# Altium PCB VoiceTouch_PCB_L6_PCB_L6.PcbDoc
Units mm, origin at the board's own origin, x right, y up, seen from the top; angles counter-clockwise.
Board outline 15.41 x 20.5 mm, 6 copper layers (L1, L2 (GND), L3, L4 (PWR), L5 (GND), L6), stack 0.726 mm thick; 33 components, 61 nets, 198 pads, 0 vias.
Unrouted connection lines stored in the file: 114.
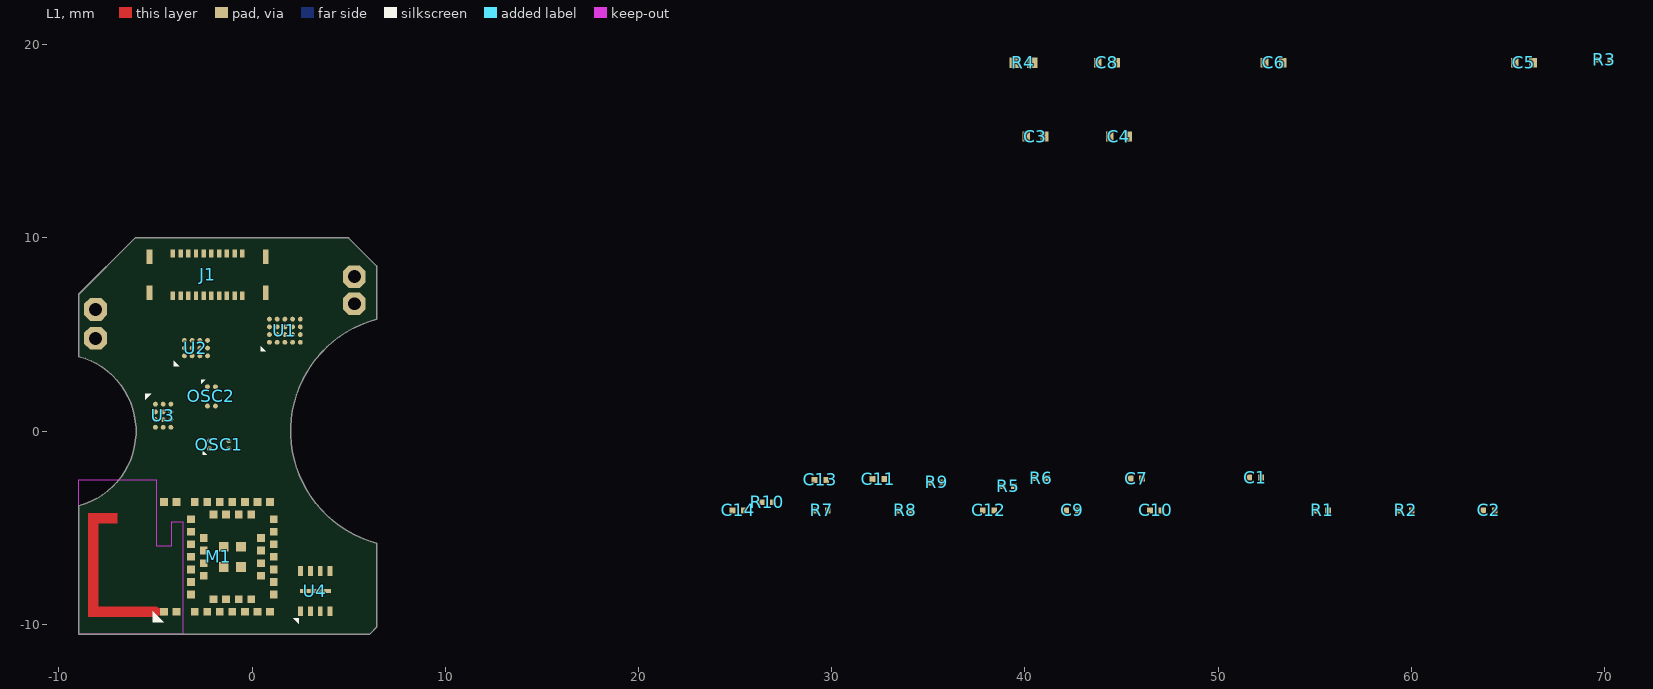
[diagram p0: L1 view]
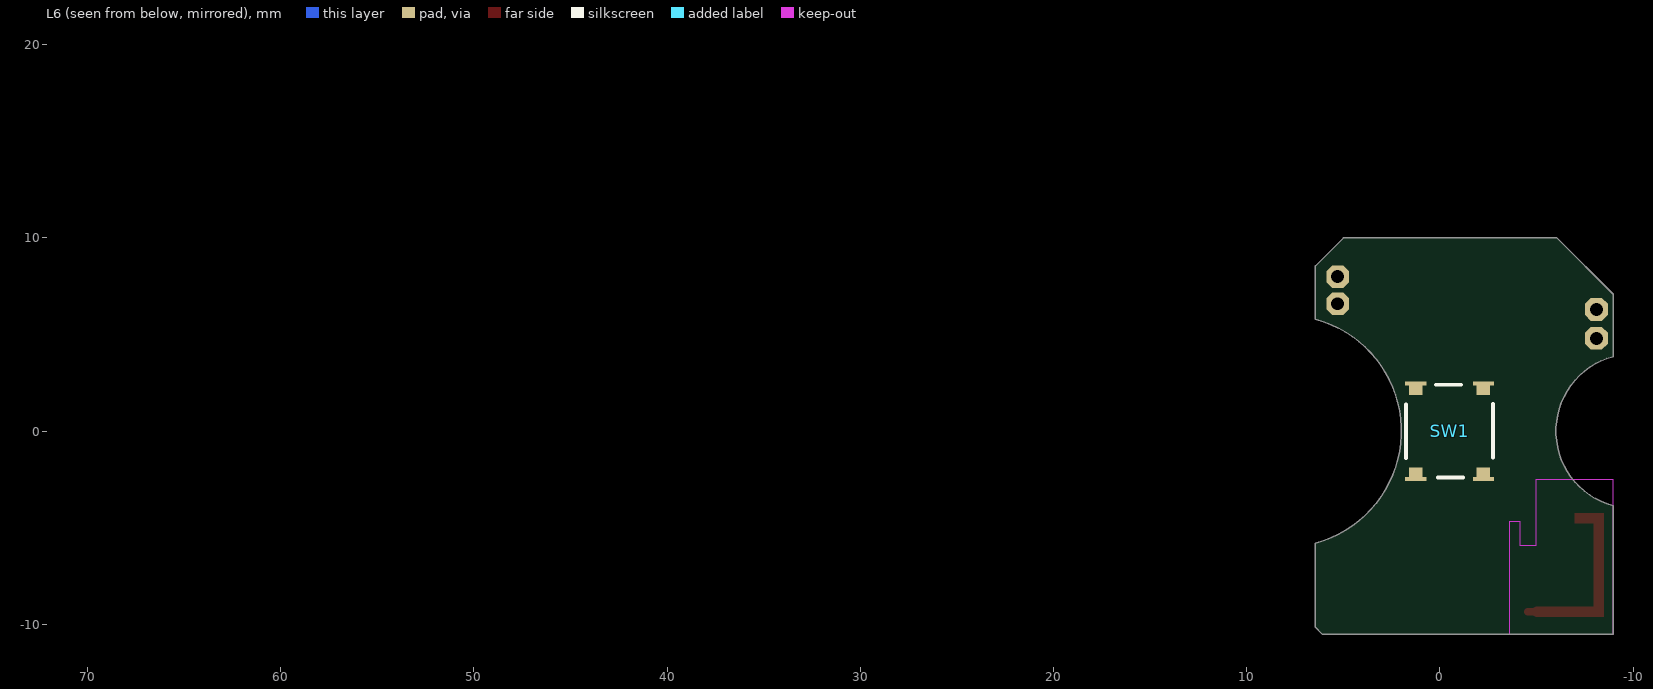
[diagram p1: L6 view, seen from below]
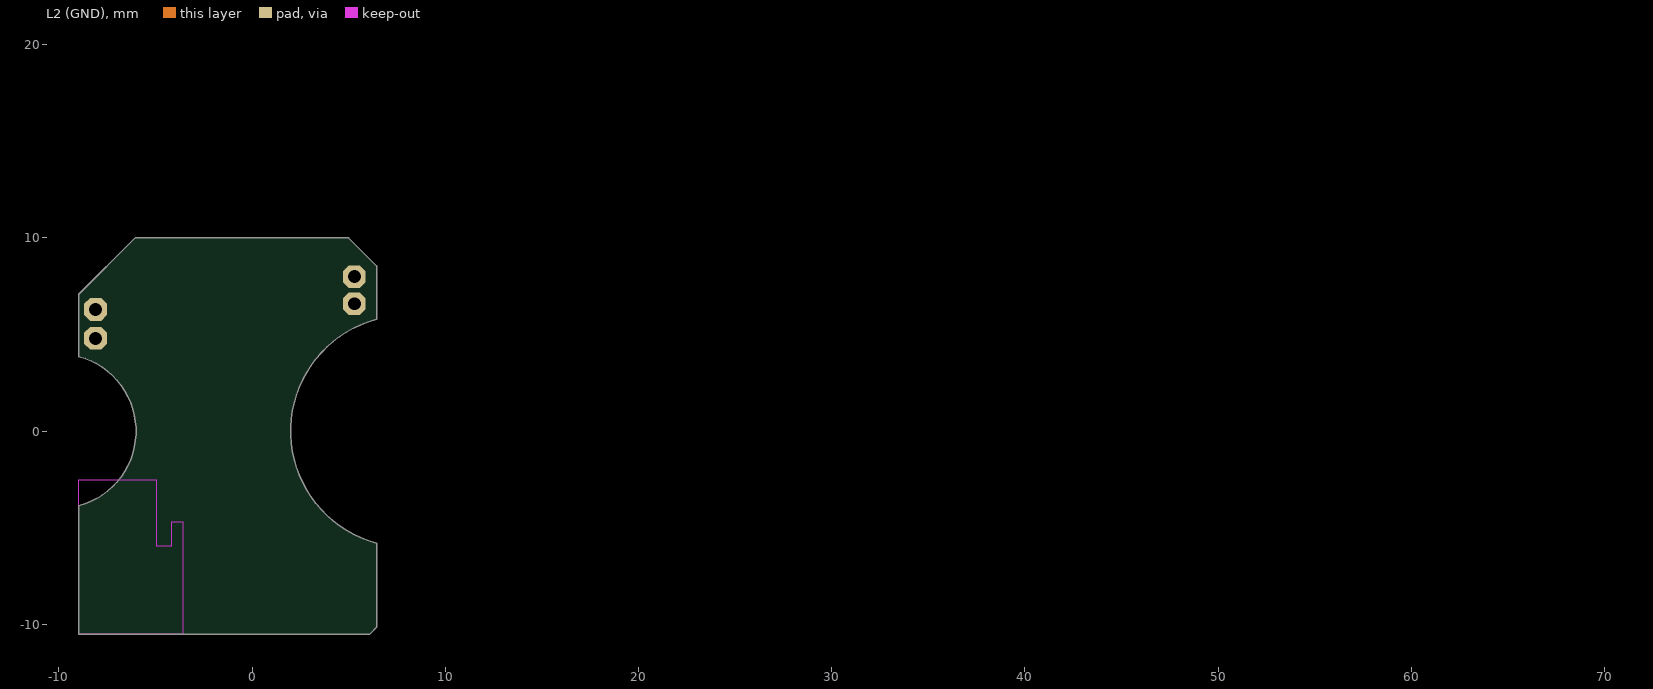
[diagram p2: L2 (GND)]
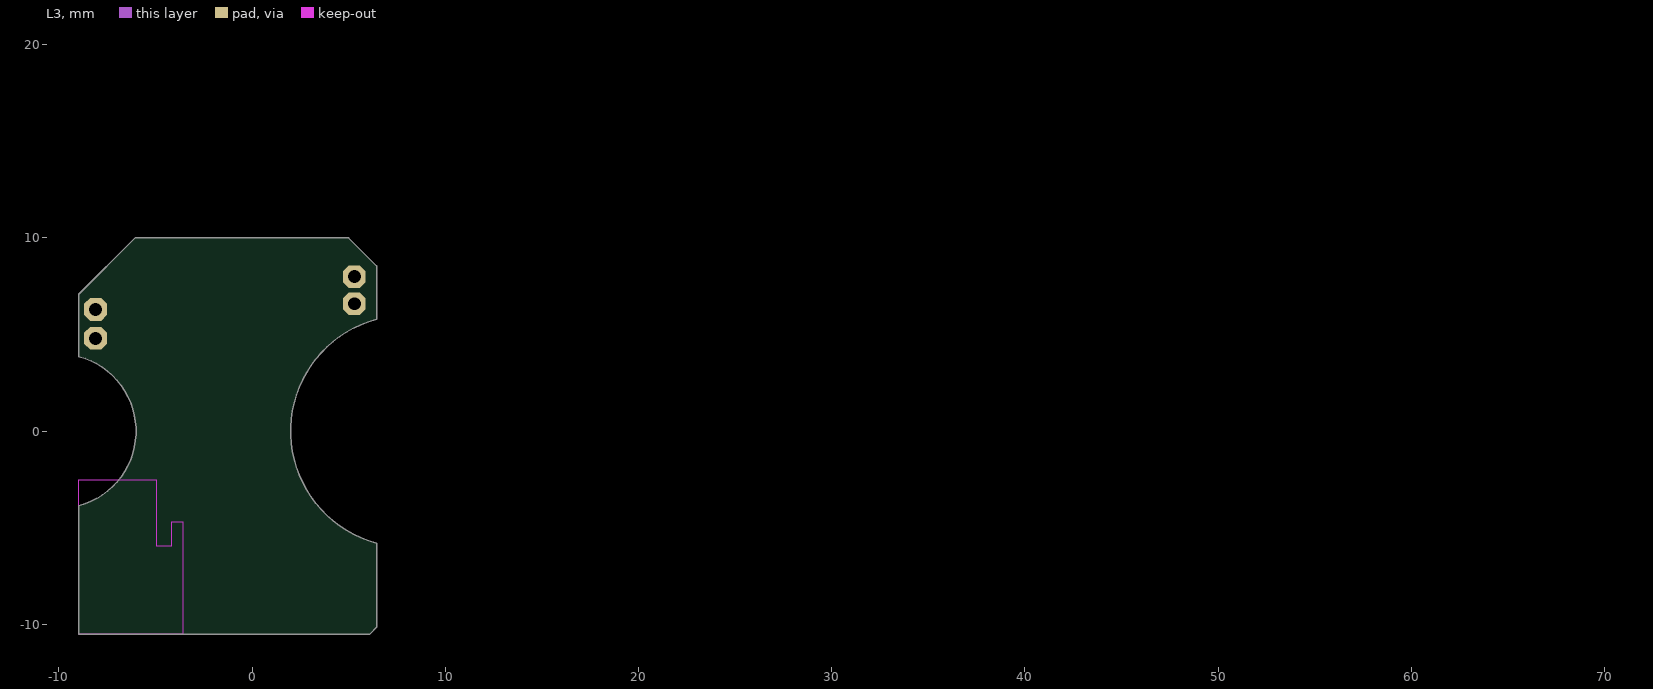
[diagram p3: L3]
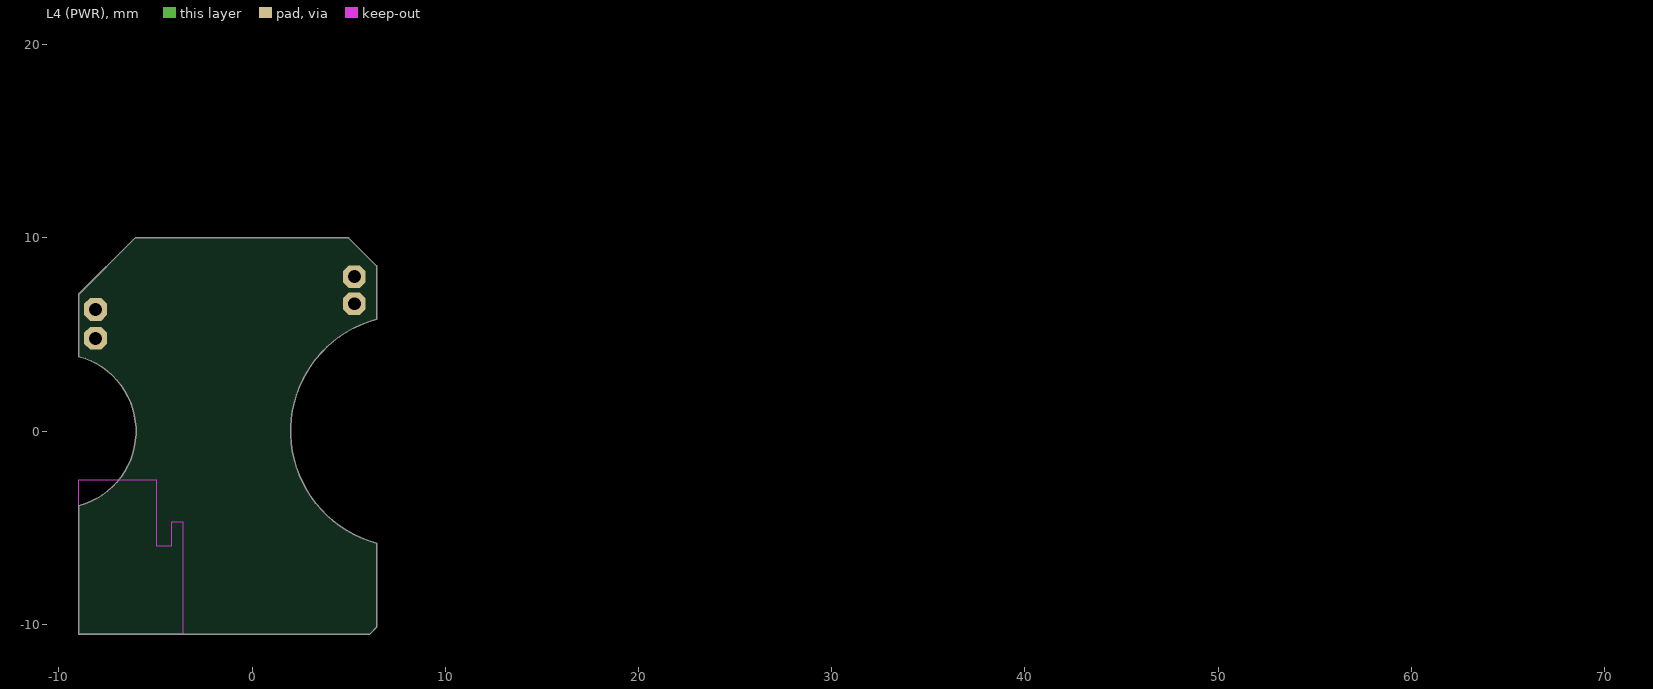
[diagram p4: L4 (PWR)]
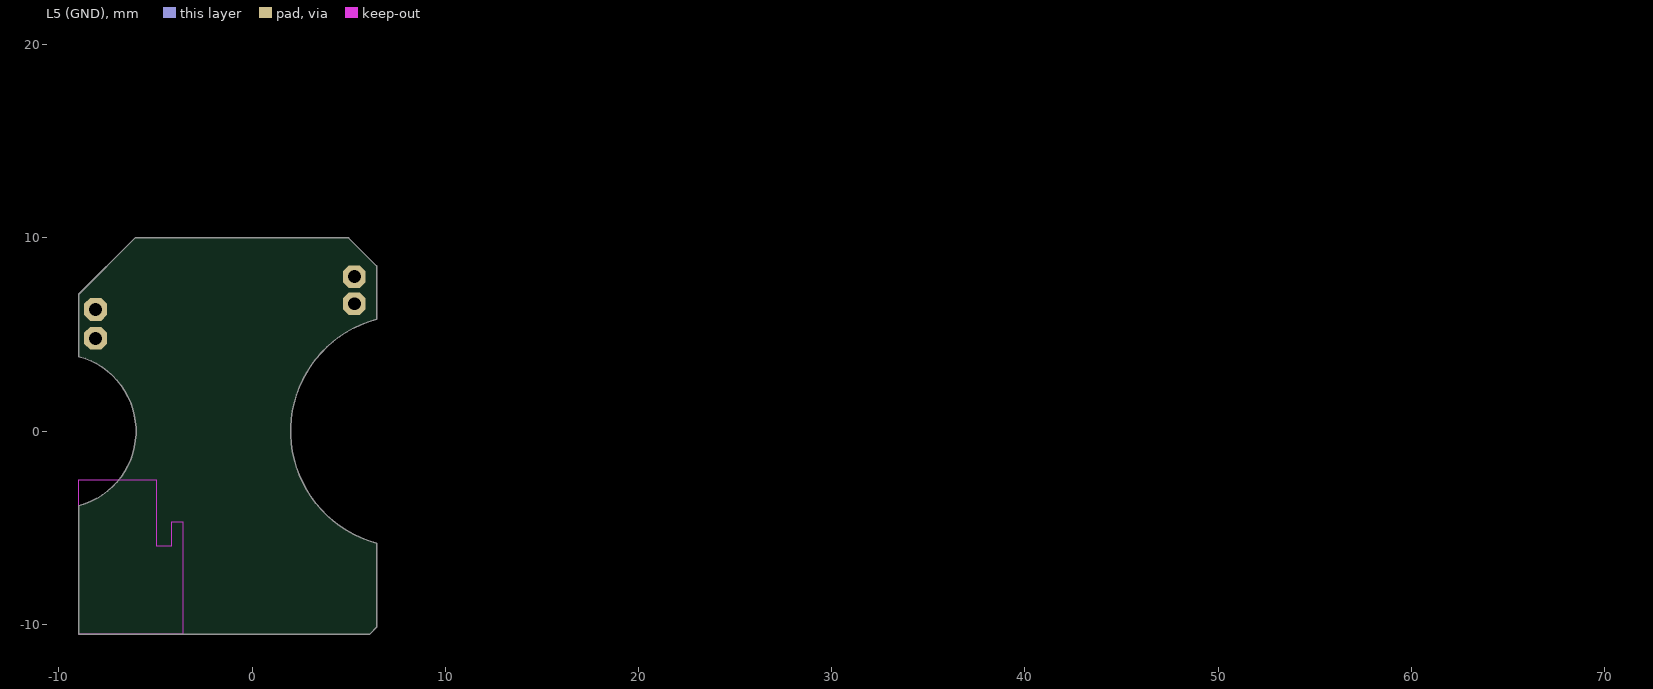
[diagram p5: L5 (GND)]

## Layer stack, top to bottom
Top Solder: solder mask 0.02, SM-001, Dk 4.2
L1: signal copper 0.012
Dielectric 1: prepreg 0.06, PP-01, Dk 4.5
L2 (GND): signal copper 0.018
Dielectric 2: core 0.2, Core-01, Dk 4.5
L3: signal copper 0.018
Dielectric 3: prepreg 0.11, PP-02, Dk 4.5
L4 (PWR): signal copper 0.018
Dielectric 4: core 0.2, Core-01, Dk 4.5
L5 (GND): signal copper 0.018
Dielectric 5: prepreg 0.06, PP-01, Dk 4.5
L6: signal copper 0.012
Bottom Solder: solder mask 0.02, SM-001, Dk 4.2

## Board outline
-8.965,-10.5 -8.965,-3.864 ccw(c-10,0) -8.965,3.864 -8.965,7.085 -6.05,10 5,10 6.447,8.553 6.447,5.796 ccw(c8,0) 6.447,-5.796 6.447,-10.153 6.1,-10.5

## Design rules (kind name [scope] priority, off if disabled: settings)
AcuteAngle [All] p1: minimum=4.49000000000000E+0001 checktracksonly=FALSE
BoardOutlineClearance BoardOutlineClearance_Silk [OnLayer('Top Overlay') or OnLayer('Bottom Overlay')] p1: gap=0 ignorepadtopadclearanceinfootprint=FALSE
BoardOutlineClearance BoardOutlineClearance_Text [IsText] p2: gap=0 ignorepadtopadclearanceinfootprint=FALSE
BoardOutlineClearance BoardOutlineClearance_EdgeComponents [InPadClass('Edge Pads')] p3: gap=0 ignorepadtopadclearanceinfootprint=FALSE
BoardOutlineClearance [All] p4: gap=0.3 ignorepadtopadclearanceinfootprint=FALSE except(0: THPad-CutoutEdge)
Clearance Clearance_Fiducials [InComponentClass('Fiducial') vs InComponentClass('Fiducial')] p1: gap=0 ignorepadtopadclearanceinfootprint=FALSE
Clearance "Clearance_Poly to Keepout" [IsRegion vs OnLayer('Keep-Out Layer')] p2: gap=0.1 ignorepadtopadclearanceinfootprint=FALSE
Clearance "Clearance_Poly to Inner Layers" [IsRegion and InLayerClass('Internal Layers')] p3: gap=0.15 ignorepadtopadclearanceinfootprint=FALSE
Clearance "Clearance_Poly to all" [IsRegion and InNet('GND')] p4: gap=0.15 ignorepadtopadclearanceinfootprint=FALSE
Clearance Clearance_NPTH [(InPadClass('NPTH'))] p5: gap=0.2 ignorepadtopadclearanceinfootprint=FALSE
Clearance [All] p6: gap=0.1 ignorepadtopadclearanceinfootprint=FALSE
ComponentClearance ComponentClearance_J2_J4 [InComponent('J2') vs InComponent('J4')] p1: gap=0 collisioncheckmode=3 verticalgap=0 showdistances=FALSE
ComponentClearance ComponentClearance_R5_R2 [InComponent('R5') vs InComponent('R2')] p2: gap=0 collisioncheckmode=3 verticalgap=0 showdistances=FALSE
ComponentClearance ComponentClearance_R8_R12 [InComponent('R8') vs InComponent('R12')] p3: gap=0 collisioncheckmode=3 verticalgap=0 showdistances=FALSE
ComponentClearance ComponentClearance_TESTPOINTS [InComponentClass('TESTPOINTS')] p4: gap=0 collisioncheckmode=3 verticalgap=0 showdistances=FALSE
ComponentClearance [All] p5: gap=0.1 collisioncheckmode=3 verticalgap=0.1 showdistances=FALSE
DiffPairsRouting [All] p1: maxlimit=0.165 minlimit=0.155 mostfreqgap=0.165 toplayer_mingap=0.165 toplayer_minwidth=0.105 toplayer_maxwidth=0.105 toplayer_prefwidth=0.105 midlayer1_maxgap=0.155 midlayer1_prefgap=0.155 midlayer1_minwidth=0.13 midlayer1_maxwidth=0.13 midlayer1_prefwidth=0.13 midlayer2_maxgap=0.155 midlayer2_prefgap=0.155 midlayer2_minwidth=0.13 midlayer2_maxwidth=0.13 midlayer2_prefwidth=0.13 midlayer3_mingap=0.165 midlayer3_minwidth=0.105 midlayer3_maxwidth=0.105 midlayer3_prefwidth=0.105 midlayer4_mingap=0.165 midlayer4_minwidth=0.105 midlayer4_maxwidth=0.105 midlayer4_prefwidth=0.105 bottomlayer_mingap=0.165 bottomlayer_minwidth=0.105 bottomlayer_maxwidth=0.105 bottomlayer_prefwidth=0.105 maxuncoupledlength=12.7
HoleSize [All] p1: absolutevalues=TRUE maxlimit=6.5 minlimit=0.1 maxpercent=80.000 minpercent=20.000
HoleToHoleClearance [All] p1: gap=0.2 allowstackedmicrovias=TRUE
Length [InNetClass('Xtal')] p1: maxlimit=2540 minlimit=0
MinimumAnnularRing MinimumAnnularRing_ThermalPadVias [IsVia and InAnyComponent] p1: minimumring=0.1
MinimumAnnularRing MinimumAnnularRing_MicroVia [IsVia AND (HoleSize = 0.1)] p2: minimumring=0.05
MinimumAnnularRing [All] p3: minimumring=0.1
MinimumSolderMaskSliver [All] p1: minsoldermaskwidth=0.03
PlaneClearance [All] p1: clearance=0.2
PlaneConnect [All] p1: planeconnectstyle=Direct reliefexpansion=0.1 reliefentries=4 reliefconductorwidth=0.1 reliefairgap=0.1
PolygonConnect [All] p1: connectstyle=Direct reliefconductorwidth=0.1 reliefentries=4 polygonreliefangle="90 Angle" airgapwidth=0.1
RoutingVias ThermalPadVias [IsVia and InAnyComponent] p1: holewidth=0.2 width=0.45 viastyle="Through Hole" minholewidth=0.2 minwidth=0.4 maxholewidth=0.25 maxwidth=0.5
RoutingVias [All] p2: holewidth=0.2 width=0.4 viastyle="Through Hole" minholewidth=0.1 minwidth=0.2 maxholewidth=0.3 maxwidth=0.55
SMDEntry [All] p1: side=TRUE corner=TRUE anyangle=TRUE
SilkToSilkClearance [All] p1: silktosilkclearance=0
SilkToSolderMaskClearance [IsPad] p1: minsilkscreentomaskgap=0.1 clearancetoexposedcopper=TRUE
SolderMaskExpansion [All] p1: expansion=0.07 istentingtop=FALSE useseparateexpansions=TRUE expansionbottom=0.07 istentingbottom=FALSE
Width Width_Power [InNet('+*') or InNet('GND')] p1: maxlimit=1 minlimit=0.15 preferedwidth=0.25
Width [All] p2: maxlimit=1 minlimit=0.1 preferedwidth=0.1
21 further rules are at their usual default settings.

## Classes and differential pairs
net class "GPIO Restrictions": P0.22 P0.23 P0.25 P0.26 P0.27 P0.28 P0.29 P0.30 P.0.31

## Components (designator, comment, footprint, x,y, rotation, side; value= is the part's Value field where it differs from the comment)
C1 "100nF" CAPC0603X03N 51.919,-2.4 r0 top
C2 "100nF" CAPC0603X03N 64.024,-4.099 r0 top
C3 "4.7uF" CAPC1005X06N 40.544,15.25 r0 top
C4 "1uF" CAPC1005X06N 44.869,15.25 r0 top
C5 "2.2uF" CAPC1005X06N 65.828,19.077 r0 top
C6 "1uF" CAPC1005X06N 52.878,19.077 r0 top
C7 "100nF" CAPC0603X03N 45.769,-2.45 r0 top
C8 "4.7uF" CAPC1005X06N 44.252,19.077 r0 top
C9 "100nF" CAPC0603X03N 42.448,-4.099 r0 top
C10 "100nF" CAPC0603X03N 46.773,-4.099 r0 top
C11 "100nF" CAPC0603X03N 32.419,-2.475 r0 top
C12 "100nF" CAPC0603X03N 38.123,-4.099 r0 top
C13 "100nF" CAPC0603X03N 29.419,-2.525 r0 top
C14 "100nF" CAPC0603X03N 25.172,-4.099 r0 top
J1 "BM20B(0.8)-20DS-0.4V(53)" BM20B(0.8)-20DS-0.4V(53) -2.3,8.1 r180 top
M1 "ANNA-B112-00B" ANNA-B112 -1.72,-6.506 r90 top
OSC1 "SIT1532AC-J5-DCC-32.768E" SIT1532 -1.7,-0.7 r0 top
OSC2 "SIT8021AI-J4-18S-2.048000E" SIT1532 -2.1,1.8 r270 top
R1 "100K" RESC0603X02N 55.399,-4.099 r0 top
R2 "10K" RESC0603X02N 59.724,-4.099 r0 top
R3 "100R" RESC0603X02N 70.003,19.227 r0 top
R4 "10K NTC" NTC1005X05N 39.927,19.077 r0 top
R5 "100R" RESC0603X02N 39.144,-2.85 r0 top
R6 "100R" RESC0603X02N 40.844,-2.425 r0 top
R7 "10K" RESC0603X02N 29.498,-4.099 r0 top
R8 "10K" RESC0603X02N 33.823,-4.099 r0 top
R9 "10K" RESC0603X02N 35.444,-2.65 r0 top
R10 "10K" RESC0603X02N 26.669,-3.675 r0 top
SW1 "TL3315NF250Q" TL3315 -0.5,0 r90 bottom
U1 "BQ25150YFPR" YFP0020ACAC 1.7,5.2 r90 top
U2 "NDP100B0" NDP100B0_BGA12C40P3X4_139X176X55 -2.9,4.3 r90 top
U3 "DA7280-00V42" BGA12C40P3X4_135X175X57 -4.6,0.8 r0 top
U4 "MX25R8035FZUIL0" USON8_3X2 3.275,-8.275 r90 top

## Footprints (in the part's own frame and the unit in brackets; to place one, negate y for a bottom-side part, rotate by r counter-clockwise, add the part's x,y. Pads: shape width x height; smd on the part's side, far side on the other; paste and mask are expansions set on the pad)
ANNA-B112 [mm]
  rect 0.4x0.4 smd mask+0.05: 1(-2.84,2.84) 2(-2.84,2.19) 3(-2.84,1.248) 4(-2.84,0.598) 5(-2.84,-0.052) 6(-2.84,-0.702) 7(-2.84,-1.352) 8(-2.84,-2.002) 9(-2.84,-2.652) 10(-2.19,0.273) 11(-2.19,-0.377) 12(-2.19,-1.027) 13(-2.19,-1.677) 14(-1.95,-2.84) 15(-1.3,-2.84) 16(-0.65,-2.84) 17(0,-2.84) 18(0.65,-2.84) 19(1.3,-2.84) 20(1.95,-2.84) 21(-0.975,-2.19) 22(-0.325,-2.19) 23(0.325,-2.19) 24(0.975,-2.19) 25(2.84,-2.652) 26(2.84,-2.002) 27(2.84,-1.352) 28(2.84,-0.702) 29(2.84,-0.052) 30(2.84,0.598) 31(2.84,1.248) 32(2.84,2.19) 33(2.84,2.84) 34(2.19,-1.677) 35(2.19,-1.027) 36(2.19,-0.377) 37(2.19,0.273) 38(1.95,1.435) 39(1.3,1.435) 40(0.65,1.435) 41(0,1.435) 42(-0.65,1.435) 43(-1.3,1.435) 44(-1.95,1.435) 45(0.975,0.785) 46(0.325,0.785) 47(-0.325,0.785) 48(-0.975,0.785)
  rect 0.5x0.5 smd mask+0.05: 49(-0.52,-0.252) 50(-0.52,-1.152) 51(0.52,-0.252) 52(0.52,-1.152)
  silkscreen extent -3.39,2.84 -2.82,3.41, body extent -3.25,-3.25 3.25,3.25, height 1.26
BGA12C40P3X4_135X175X57 [mm] "BGA, 12-Leads, Body 1.35x1.75mmx0.57mm, Pitch 0.40mm"
  round 0.25 smd mask+0.05: A1(-0.4,0.6) A2(0,0.6) A3(0.4,0.6) B1(-0.4,0.2) B2(0,0.2) B3(0.4,0.2) C1(-0.4,-0.2) C2(0,-0.2) C3(0.4,-0.2) D1(-0.4,-0.6) D2(0,-0.6) D3(0.4,-0.6)
  round 0.25 on Mech2 mask+0.05: A1(-0.4,0.6)
  silkscreen extent -0.93,0.82 -0.63,1.12, body extent -0.67,-0.87 0.67,0.87, height 0.58
BM20B(0.8)-20DS-0.4V(53) [mm]
  rect 0.23x0.42 smd mask+0.03: 1(-1.8,-1.09) 2(-1.8,1.09) 3(-1.4,-1.09) 4(-1.4,1.09) 5(-1,-1.09) 6(-1,1.09) 7(-0.6,-1.09) 8(-0.6,1.09) 9(-0.2,-1.09) 10(-0.2,1.09) 11(0.2,-1.09) 12(0.2,1.09) 13(0.6,-1.09) 14(0.6,1.09) 15(1,-1.09) 16(1,1.09) 17(1.4,-1.09) 18(1.4,1.09) 19(1.8,-1.09) 20(1.8,1.09)
  rect 0.3x0.75 smd mask+0.03: SH1(-3.01,-0.925) SH2(-3.01,0.925) SH3(3.01,-0.925) SH4(3.01,0.925)
  body extent -3.24,-1.15 3.24,1.15, height 0.81
CAPC0603X03N [mm] "Chip Capacitor, 2-Leads, Body 0.60x0.30mm, IPC Medium Density"
  rect 0.3x0.3 smd mask+0.05: 1(-0.3,0) 2(0.3,0)
  L1 pour cut-out: -0.15,0.15 0.15,0.15 0.15,-0.15 -0.15,-0.15
  body extent -0.3,-0.15 0.3,0.15, height 0.3
CAPC1005X06N [mm] "Chip Capacitor, 2-Leads, Body 1.00x0.50mm, IPC Medium Density"
  rect 0.4x0.5 smd mask+0.07: 1(-0.475,0) 2(0.475,0)
  L1 pour cut-out: -0.275,0.25 0.275,0.25 0.275,-0.25 -0.275,-0.25
  body extent -0.53,-0.28 0.53,0.28, height 0.55
NDP100B0_BGA12C40P3X4_139X176X55 [mm] "BGA, 12-Leads, Body 1.39x1.76mmx0.55mm, Pitch 0.40mm"
  round 0.25 smd mask+0.04: A1(-0.4,0.6) A2(0,0.6) A3(0.4,0.6) B1(-0.4,0.2) B2(0,0.2) B3(0.4,0.2) C1(-0.4,-0.2) C2(0,-0.2) C3(0.4,-0.2) D1(-0.4,-0.6) D2(0,-0.6) D3(0.4,-0.6)
  silkscreen extent -0.95,0.86 -0.66,1.15, body extent -0.69,-0.88 0.69,0.88, height 0.55
NTC1005X05N [mm] "NTC, 2-Leads, Body 1.00x0.50mm, IPC Medium Density"
  rect 0.55x0.55 smd mask+0.07: 1(-0.45,0) 2(0.45,0)
  body extent -0.5,-0.25 0.5,0.25, height 0.5
RESC0603X02N [mm] "Chip Resistor, 2-Leads, Body 0.60x0.30mm, IPC Medium Density"
  rect 0.3x0.3 smd mask+0.05: 1(-0.3,0) 2(0.3,0)
  L1 pour cut-out: -0.15,0.15 0.15,0.15 0.15,-0.15 -0.15,-0.15
  body extent -0.3,-0.15 0.3,0.15, height 0.23
SIT1532 [mm]
  round 0.25 smd mask+0.05: 1(-0.5,-0.205) 2(0.5,-0.205) 3(0.5,0.205) 4(-0.5,0.205)
  silkscreen extent -0.85,-0.53 -0.65,-0.33, body extent -0.77,-0.42 0.77,0.42, height 0.61
TL3315 [mm]
  rect 0.2x1.1 smd: 1(-2.475,1.75) 2(2.475,1.75) 3(-2.475,-1.75) 4(2.475,-1.75)
  rect 0.7x0.7 smd: 1(-2.225,1.75) 2(2.225,1.75) 3(-2.225,-1.75) 4(2.225,-1.75)
  silkscreen extent -2.4,-2.25 2.4,2.25, body extent -2.37,-2.25 2.38,2.25, height 0.61
USON8_3X2 [mil]
  rect 19.68x10 smd mask+1.97: 1(-41,30) 2(-41,10) 3(-41,-10) 4(-41,-30) 5(41,-30) 6(41,-10) 7(41,10) 8(41,30)
  rect 7.87x62.99 smd mask+1.97: 9(0,0)
  silkscreen extent -67,33 -55,45, body extent -48,-39 48,39, height 24
YFP0020ACAC [mm]
  round 0.25 smd paste-0.13 mask+0.038: A1(-0.6,0.8) A2(-0.2,0.8) A3(0.2,0.8) A4(0.6,0.8) B1(-0.6,0.4) B2(-0.2,0.4) B3(0.2,0.4) B4(0.6,0.4) C1(-0.6,0) C2(-0.2,0) C3(0.2,0) C4(0.6,0) D1(-0.6,-0.4) D2(-0.2,-0.4) D3(0.2,-0.4) D4(0.6,-0.4) E1(-0.6,-0.8) E2(-0.2,-0.8) E3(0.2,-0.8) E4(0.6,-0.8)
  silkscreen extent -1.05,1 -0.8,1.25, body extent -0.82,-1.02 0.83,1.03, height 0.5

## Part data
C1 C2 C7 C9 C10 C11 C12 C13 C14: library part GRM033C71C104ME14D, "CAP CER 0.1UF 16V X7S 0201", Case Code (Imperial)=0201, Case Code (Metric)=0603, Dielectric=X7S, Manufacturer=Murata, Max Operating Temperature=125°C, Min Operating Temperature=-55°C, Package Quantity=15000, Supplier Part Number 1=490-10388-1-ND, Tolerance=20%, Voltage Rating=16V, Capacitance=100nF, Case/Package=0201, Category="Ceramic Capacitors", ComponentLink1Description=http://www.mouser.com/ds/2/281/c02e-2905.pdf?src-supplier=Mouser, ComponentLink1URL=http://www.mouser.com/ds/2/281/c02e-2905.pdf?src-supplier=Mouser, ComponentLink2Description=http://search.murata.co.jp/Ceramy/image/img/A01X/G101/ENG/GRM033C71C104ME14-01.pdf?src-supplier=Digi-Key, ComponentLink2URL=http://search.murata.co.jp/Ceramy/image/img/A01X/G101/ENG/GRM033C71C104ME14-01.pdf?src-supplier=Digi-Key, Height=0.3mm, Length=0.024inch, Manufacturer Part Number=GRM033C71C104ME14D, Mount="Surface Mount", Packaging="Tape and Reel", Pricing 1="1=0.10000, 10=0.05100, 50=0.02780, 100=0.02260, 500=0.01616, 1000=0.01270, 2500=0.01155, 5000=0.01063 (USD)", RoHS=Yes, RoHS Compliant=Yes, Stock 1=1023970, Supplier 1=Digi-Key, Termination=SMD/SMT, Thickness=0.013inch, Voltage Rating (DC)=16V, Weight=1.2E-05oz, Width=0.012inch
C3 C8: library part CL05A475MO5NUNC, "CAP CER 4.7UF 16V X5R 0402", Case Code (Imperial)=0402, Case Code (Metric)=1005, Manufacturer=Samsung, Max Operating Temperature=85°C, Min Operating Temperature=-55°C, Supplier Part Number 1=1276-6836-1-ND, Tolerance=20%, Voltage Rating=16V, Capacitance=4.7uF, Case/Package=0402, Category 1=Capacitors, Category 2="Ceramic Capacitors", ComponentLink1Description=http://www.farnell.com/datasheets/2710653.pdf?src-supplier=Farnell, ComponentLink1URL=http://www.farnell.com/datasheets/2710653.pdf?src-supplier=Farnell, ComponentLink2Description=http://www.samsungsem.com/kr/support/product-search/mlcc/CL05A475MO5NUNC.jsp?src-supplier=Digi-Key, ComponentLink2URL=http://www.samsungsem.com/kr/support/product-search/mlcc/CL05A475MO5NUNC.jsp?src-supplier=Digi-Key, ComponentLink3Description=http://www.farnell.com/datasheets/2710653.pdf?src-supplier=Newark, ComponentLink3URL=http://www.farnell.com/datasheets/2710653.pdf?src-supplier=Newark, Length=0.039inch, Manufacturer 1=Samsung, Manufacturer Part Number=CL05A475MO5NUNC, Manufacturer Part Number 1=CL05A475MO5NUNC, Mount="Surface Mount", Packaging="Tape and Reel", Pricing 1="1=0.45000, 10=0.32100, 100=0.21130, 500=0.15656, 1000=0.13307, 2500=0.12524, 5000=0.11741 (USD)", RoHS=Yes, Stock 1=1960205, Supplier 1=Digi-Key, Thickness=0.022inch, Width=0.02inch
C4 C6: library part CL05A105KO5NNNC, "CAP CER 1UF 16V X5R 0402", Case Code (Imperial)=0402, Case Code (Metric)=1005, Dielectric=X5R, Manufacturer=Samsung, Max Operating Temperature=85°C, Min Operating Temperature=-55°C, Package Quantity=1, Supplier Part Number 1=1276-1067-1-ND, Tolerance=10%, Voltage=16V, Capacitance=1uF, Case/Package=0402, Category="Ceramic Capacitors", ComponentLink1Description=https://datasheet.ciiva.com/16207/cl05a105ko5nnnc-16207571.pdf?src-supplier=Future+Electronics, ComponentLink1URL=https://datasheet.ciiva.com/16207/cl05a105ko5nnnc-16207571.pdf?src-supplier=Future+Electronics, ComponentLink2Description=https://datasheet.ciiva.com/15195/getdatasheetpartid-355272-15195629.pdf?src-supplier=Verical, ComponentLink2URL=https://datasheet.ciiva.com/15195/getdatasheetpartid-355272-15195629.pdf?src-supplier=Verical, Contact Plating=Tin, Depth=0.5mm, Height=0.5mm, Length=1mm, Manufacturer Part Number=CL05A105KO5NNNC, Mount="Surface Mount", Packaging="Tape and Reel", Pricing 1="1=0.10000, 10=0.04400, 50=0.02400, 100=0.01960, 500=0.01402, 1000=0.01101, 2500=0.01001, 5000=0.00921 (USD)", Radiation Hardening=No, RoHS=Yes, Stock 1=2455652, Supplier 1=Digi-Key, Thickness=0.022inch, Voltage Rating=16V, Width=0.02inch
C5: library part CL05A225KP7NSB8, "CAP CER 2.2UF 10V X5R 0402", Case Code (Imperial)=0402, Case Code (Metric)=1005, Manufacturer=Samsung, Max Operating Temperature=85°C, Min Operating Temperature=-55°C, Supplier Part Number 1=1276-6820-1-ND, Tolerance=10%, Voltage Rating=10V, Capacitance=2.2uF, Case/Package=0402, Category 1=Capacitors, Category 2="Ceramic Capacitors", ComponentLink1Description=http://www.samsungsem.com/kr/support/product-search/mlcc/CL05A225KP7NSB8.jsp?src-supplier=Digi-Key, ComponentLink1URL=http://www.samsungsem.com/kr/support/product-search/mlcc/CL05A225KP7NSB8.jsp?src-supplier=Digi-Key, Length=0.039inch, Manufacturer Part Number=CL05A225KP7NSB8, Mount="Surface Mount", Packaging="Tape and Reel", Pricing 1="1=0.37000, 10=0.25500, 100=0.14450, 500=0.10198, 1000=0.08924, 2500=0.08499 (USD)", RoHS=Yes, Stock 1=159500, Supplier 1=Digi-Key, Thickness=0.031inch, Width=0.02inch
J1: "CONN RCPT 20POS 0.4MM SMD", Current Rating=300mA, Insulation Resistance=50MR, Manufacturer=Hirose, Max Operating Temperature=85°C, Min Operating Temperature=-35°C, Package Quantity=1000, Supplier Part Number 1=H122165CT-ND, Voltage Rating=30V, Category="Headers and Wire Housings", ComponentLink1Description=https://datasheet.ciiva.com/29164/en-bm20-20130409-29164358.pdf?src-supplier=Digi-Key, ComponentLink1URL=https://datasheet.ciiva.com/29164/en-bm20-20130409-29164358.pdf?src-supplier=Digi-Key, Connector Type=Receptacle, Contact Plating=Gold, Housing Material=Polymer, Manufacturer Part Number=BM20B(0.8)-20DS-0.4V(53), Mated Stacking Heights=0.8mm, Mount="Surface Mount", Number of Positions=20, Number of Rows=2, Packaging="Tape and Reel", Pitch=0.016inch, Pricing 1="1=1.22000, 10=1.07100, 25=1.00800, 50=0.96600, 100=0.92400, 250=0.84000, 500=0.75600 (USD)", RoHS=Yes, RoHS Compliant=Yes, Stack Height=0.8mm, Stock 1=775, Supplier 1=Digi-Key, Termination=SMD/SMT
M1: "RX TXRX MODULE BLUETOOTH SMD", Case/Package=SMD/SMT, Frequency=2.4GHz, Manufacturer=u-blox, Max Operating Temperature=85°C, Min Operating Temperature=-40°C, Supplier Part Number 1=672-1101-1-ND, Category="RF Receivers, Transceivers", ComponentLink1Description=https://www.u-blox.com/sites/default/files/ANNA-B112_DataSheet_%28UBX-18011707%29.pdf?src-supplier=Digi-Key, ComponentLink1URL=https://www.u-blox.com/sites/default/files/ANNA-B112_DataSheet_%28UBX-18011707%29.pdf?src-supplier=Digi-Key, Data Rate=2Mbps, Interface=SPI,USB,UART, Manufacturer Part Number=ANNA-B112-00B, Packaging="Tape and Reel", Pricing 1="1=8.90000, 10=7.56700, 50=6.43180, 100=5.79880 (USD)", RoHS=No, Sensitivity=-96dBm, Stock 1=24, Supplier 1=Digi-Key
OSC1: "MEMS OSC XO 32.7680KHZ LVCMOS", Frequency=32.768kHz, Frequency Stability=75ppm, Manufacturer=SiTime, Max Operating Temperature=70°C, Max Supply Current=1.3uA, Min Operating Temperature=-10°C, Supplier Part Number 1=1473-1313-1-ND, Category=Oscillators, ComponentLink1Description=http://www.sitime.com/products/datasheets/sit1532/SiT1532-datasheet.pdf?src-supplier=Digi-Key, ComponentLink1URL=http://www.sitime.com/products/datasheets/sit1532/SiT1532-datasheet.pdf?src-supplier=Digi-Key, ComponentLink2Description=https://www.sitime.com/datasheet/SiT1532?src-supplier=Digi-Key, ComponentLink2URL=https://www.sitime.com/datasheet/SiT1532?src-supplier=Digi-Key, Height=0.024inch, Length=0.061inch, Manufacturer Part Number=SIT1532AC-J5-DCC-32.768E, Mount="Surface Mount", Packaging="Tape and Reel", Pricing 1="1=1.25000, 10=1.10300, 50=1.03120, 100=0.91120, 500=0.86328 (USD)", RoHS=Yes, Stock 1=4488, Supplier 1=Digi-Key, Width=0.033inch
OSC2: "MEMS OSC XO 2.0480MHZ LVCMOS SMD", Frequency=2.048MHz, Frequency Stability=100ppm, Manufacturer=SiTime, Max Operating Temperature=85°C, Max Supply Current=130uA, Min Operating Temperature=-40°C, Supplier Part Number 1=1473-1352-1-ND, Category=Oscillators, ComponentLink1Description=http://www.sitime.com/products/datasheets/sit8021/SiT8021-datasheet.pdf?src-supplier=Digi-Key, ComponentLink1URL=http://www.sitime.com/products/datasheets/sit8021/SiT8021-datasheet.pdf?src-supplier=Digi-Key, ComponentLink2Description=https://www.sitime.com/datasheet/SiT8021?src-supplier=Digi-Key, ComponentLink2URL=https://www.sitime.com/datasheet/SiT8021?src-supplier=Digi-Key, Height=0.024inch, Length=0.061inch, Manufacturer Part Number=SIT8021AI-J4-18S-2.048000E, Mount="Surface Mount", Packaging="Tape and Reel", Pricing 1="1=1.21000, 10=1.07200, 50=1.00200, 100=0.97860 (USD)", RoHS=Yes, RoHS Compliant=Yes, Stock 1=1642, Supplier 1=Digi-Key, Width=0.033inch
R1: library part RC0201JR-07100KL, "RES SMD 100K OHM 5% 1/20W 0201", Case Code (Imperial)=0201, Case Code (Metric)=0603, Manufacturer=Yageo, Max Operating Temperature=125°C, Max Power Dissipation=50mW, Min Operating Temperature=-55°C, Package Quantity=1, Resistance=100kR, Resistance Tolerance=5%, Resistor Type="Thick Film", Supplier Part Number 1=311-100KNCT-ND, Temperature Coefficient=200ppm/°C, Voltage Rating=25V, Case/Package=0201, Category="Chip SMD Resistors", ComponentLink1Description=https://datasheet.ciiva.com/2462/pyu-r-int-thick-7-2462817.pdf?src-supplier=Digi-Key, ComponentLink1URL=https://datasheet.ciiva.com/2462/pyu-r-int-thick-7-2462817.pdf?src-supplier=Digi-Key, ComponentLink2Description=https://datasheet.ciiva.com/2462/pyu-r-int-thick-7-2462818.pdf?src-supplier=Digi-Key, ComponentLink2URL=https://datasheet.ciiva.com/2462/pyu-r-int-thick-7-2462818.pdf?src-supplier=Digi-Key, ComponentLink3Description=https://datasheet.ciiva.com/2462/pyu-r-int-thick-7-2462819.pdf?src-supplier=Digi-Key, ComponentLink3URL=https://datasheet.ciiva.com/2462/pyu-r-int-thick-7-2462819.pdf?src-supplier=Digi-Key, ComponentLink4Description=https://datasheet.ciiva.com/28639/1421516-28639863.pdf?src-supplier=Element14, ComponentLink4URL=https://datasheet.ciiva.com/28639/1421516-28639863.pdf?src-supplier=Element14, ComponentLink5Description=https://datasheet.ciiva.com/8888/pyu-rc0201-51-rohs-l-8-8888005.pdf?src-supplier=Avnet, ComponentLink5URL=https://datasheet.ciiva.com/8888/pyu-rc0201-51-rohs-l-8-8888005.pdf?src-supplier=Avnet, ComponentLink6Description=https://datasheet.ciiva.com/8896/pyu-rc0201-51-rohs-l-8-8896213.pdf?src-supplier=Avnet, ComponentLink6URL=https://datasheet.ciiva.com/8896/pyu-rc0201-51-rohs-l-8-8896213.pdf?src-supplier=Avnet, ComponentLink7Description=https://datasheet.ciiva.com/7672/1563626-7672249.pdf?src-supplier=Element14, ComponentLink7URL=https://datasheet.ciiva.com/7672/1563626-7672249.pdf?src-supplier=Element14, ComponentLink8Description=https://datasheet.ciiva.com/7672/1563626-7672250.pdf?src-supplier=Element14, ComponentLink8URL=https://datasheet.ciiva.com/7672/1563626-7672250.pdf?src-supplier=Element14, ComponentLink9Description=https://datasheet.ciiva.com/28395/pyu-rc0201-51-rohs-l-8-28395542.pdf?src-supplier=Avnet+Europe, ComponentLink9URL=https://datasheet.ciiva.com/28395/pyu-rc0201-51-rohs-l-8-28395542.pdf?src-supplier=Avnet+Europe, Construction=Rectangular, Contact Plating=Tin,Matte, Depth=0.3mm, Features="Moisture Resistant", Height=0.01inch, Lead Free="Lead Free", Length=0.6mm, Manufacturer Part Number=RC0201JR-07100KL, Military Standard=Not, Number of Terminations=2, Packaging="Tape and Reel", Power Rating=50mW, Pricing 1="1=0.10000, 10=0.02900, 100=0.01190, 1000=0.00536, 2500=0.00466, 5000=0.00385 (USD)", Radiation Hardening=No, REACH SVHC="No SVHC", RoHS=Yes, RoHS Compliant=Yes, Series=RC, Size Code=0201, Stock 1=18115, Supplier 1=Digi-Key, Termination=SMD/SMT, Tolerance=5%, Voltage Rating (DC)=25V, Weight=6E-06oz, Width=0.012inch
R2 R7 R8 R9 R10: library part RC0201FR-0710KL, "RES SMD 10K OHM 1% 1/20W 0201", Case Code (Imperial)=0201, Case Code (Metric)=0603, Manufacturer=Yageo, Max Operating Temperature=125°C, Max Power Dissipation=50mW, Min Operating Temperature=-55°C, Package Quantity=1, Resistance=10kR, Resistor Type="Thick Film", Supplier Part Number 1=311-10.0KMCT-ND, Temperature Coefficient=200ppm/°C, Tolerance=1%, Voltage Rating=25V, Case/Package=0201, Category="Chip SMD Resistors", ComponentLink1Description=https://datasheet.ciiva.com/2467/pyu-r-int-thick-7-2467109.pdf?src-supplier=Digi-Key, ComponentLink1URL=https://datasheet.ciiva.com/2467/pyu-r-int-thick-7-2467109.pdf?src-supplier=Digi-Key, ComponentLink2Description=https://datasheet.ciiva.com/2467/pyu-r-int-thick-7-2467110.pdf?src-supplier=Digi-Key, ComponentLink2URL=https://datasheet.ciiva.com/2467/pyu-r-int-thick-7-2467110.pdf?src-supplier=Digi-Key, ComponentLink3Description=https://datasheet.ciiva.com/2467/pyu-r-int-thick-7-2467111.pdf?src-supplier=Digi-Key, ComponentLink3URL=https://datasheet.ciiva.com/2467/pyu-r-int-thick-7-2467111.pdf?src-supplier=Digi-Key, ComponentLink4Description=https://datasheet.ciiva.com/7660/1421516-7660807.pdf?src-supplier=Element14, ComponentLink4URL=https://datasheet.ciiva.com/7660/1421516-7660807.pdf?src-supplier=Element14, ComponentLink5Description=https://datasheet.ciiva.com/8891/pyu-rc0201-51-rohs-l-8-8891384.pdf?src-supplier=Avnet, ComponentLink5URL=https://datasheet.ciiva.com/8891/pyu-rc0201-51-rohs-l-8-8891384.pdf?src-supplier=Avnet, ComponentLink6Description=https://datasheet.ciiva.com/28405/pyu-rc0201-51-rohs-l-8-28405609.pdf?src-supplier=Avnet+Europe, ComponentLink6URL=https://datasheet.ciiva.com/28405/pyu-rc0201-51-rohs-l-8-28405609.pdf?src-supplier=Avnet+Europe, ComponentLink7Description=https://datasheet.ciiva.com/26829/getdatasheetpartid-421074-26829851.pdf?src-supplier=Verical, ComponentLink7URL=https://datasheet.ciiva.com/26829/getdatasheetpartid-421074-26829851.pdf?src-supplier=Verical, ComponentLink8Description=https://datasheet.ciiva.com/46391/1421516-46391339.pdf?src-supplier=Element14, ComponentLink8URL=https://datasheet.ciiva.com/46391/1421516-46391339.pdf?src-supplier=Element14, ComponentLink9Description=https://datasheet.ciiva.com/16855/pyu-rc0201-51-rohs-l-8-16855789.pdf?src-supplier=Avnet+Europe, ComponentLink9URL=https://datasheet.ciiva.com/16855/pyu-rc0201-51-rohs-l-8-16855789.pdf?src-supplier=Avnet+Europe, Contact Plating=Tin,Matte, Depth=0.3mm, Features="Moisture Resistant", Height=0.01inch, Lead Free="Lead Free", Length=0.6mm, Manufacturer Part Number=RC0201FR-0710KL, Military Standard=Not, Number of Pins=2, Number of Terminations=2, Packaging="Tape and Reel", Power Rating=50mW, Pricing 1="1=0.10000, 10=0.03700, 100=0.01500, 1000=0.00673, 2500=0.00584, 5000=0.00483 (USD)", Radiation Hardening=No, REACH SVHC="No SVHC", RoHS=Yes, Stock 1=7662035, Supplier 1=Digi-Key, Termination=SMD/SMT, Voltage Rating (DC)=25V, Weight=6E-06oz, Width=0.3mm, Working Voltage=25V
R3 R5 R6: library part RC0201FR-07100RL, "RES SMD 100 OHM 1% 1/20W 0201", Case Code (Imperial)=0201, Case Code (Metric)=0603, Manufacturer=Yageo, Max Operating Temperature=125°C, Max Power Dissipation=50mW, Min Operating Temperature=-55°C, Package Quantity=1, Resistor Type="Thick Film", Supplier Part Number 1=311-100MCT-ND, Temperature Coefficient=200ppm/°C, Tolerance=1%, Voltage Rating=25V, Case/Package=0201, Category="Chip SMD Resistors", ComponentLink1Description=https://datasheet.ciiva.com/2560/pyu-r-int-thick-7-2560865.pdf?src-supplier=Digi-Key, ComponentLink1URL=https://datasheet.ciiva.com/2560/pyu-r-int-thick-7-2560865.pdf?src-supplier=Digi-Key, ComponentLink2Description=https://datasheet.ciiva.com/2560/pyu-r-int-thick-7-2560866.pdf?src-supplier=Digi-Key, ComponentLink2URL=https://datasheet.ciiva.com/2560/pyu-r-int-thick-7-2560866.pdf?src-supplier=Digi-Key, ComponentLink3Description=https://datasheet.ciiva.com/2560/pyu-r-int-thick-7-2560867.pdf?src-supplier=Digi-Key, ComponentLink3URL=https://datasheet.ciiva.com/2560/pyu-r-int-thick-7-2560867.pdf?src-supplier=Digi-Key, ComponentLink4Description=https://datasheet.ciiva.com/16855/pyu-rc0201-51-rohs-l-8-16855781.pdf?src-supplier=Avnet+Europe, ComponentLink4URL=https://datasheet.ciiva.com/16855/pyu-rc0201-51-rohs-l-8-16855781.pdf?src-supplier=Avnet+Europe, ComponentLink5Description=https://datasheet.ciiva.com/8887/pyu-rc0201-51-rohs-l-8-8887865.pdf?src-supplier=Avnet, ComponentLink5URL=https://datasheet.ciiva.com/8887/pyu-rc0201-51-rohs-l-8-8887865.pdf?src-supplier=Avnet, ComponentLink6Description=https://datasheet.ciiva.com/28395/pyu-rc0201-51-rohs-l-8-28395391.pdf?src-supplier=Avnet+Europe, ComponentLink6URL=https://datasheet.ciiva.com/28395/pyu-rc0201-51-rohs-l-8-28395391.pdf?src-supplier=Avnet+Europe, Contact Plating=Tin,Matte, Features="Moisture Resistant", Height=0.01inch, Lead Free="Lead Free", Length=0.024inch, Manufacturer Part Number=RC0201FR-07100RL, Number of Terminations=2, Packaging="Tape and Reel", Power Rating=50mW, Pricing 1="1=0.10000, 10=0.03700, 100=0.01500, 1000=0.00673, 2500=0.00584, 5000=0.00483 (USD)", Radiation Hardening=No, REACH SVHC=Unknown, Resistance=100R, RoHS=Yes, Stock 1=263416, Supplier 1=Digi-Key, Termination=SMD/SMT, Width=0.012inch
R4: library part NCP15XH103J03RC, "THERMISTOR NTC 10KOHM 3380K 0402", Case Code (Imperial)=0402, Case Code (Metric)=1005, Current Rating=310uA, Manufacturer=Murata, Max Operating Temperature=125°C, Max Power Dissipation=100mW, Min Operating Temperature=-40°C, Package Quantity=1, Resistance=10kR, Supplier Part Number 1=490-2414-1-ND, Tolerance=5%, Accuracy=0.7%, Case/Package=0402, Category=Thermistors, Category 1="Sensors, Transducers", Category 2="Temperature Sensors - NTC Thermistors", ComponentLink1Description=https://datasheet.ciiva.com/22712/1825737-22712084.pdf?src-supplier=Element14, ComponentLink1URL=https://datasheet.ciiva.com/22712/1825737-22712084.pdf?src-supplier=Element14, ComponentLink2Description=https://datasheet.ciiva.com/11822/0900766b807f1e39-11822074.pdf?src-supplier=RSComponents, ComponentLink2URL=https://datasheet.ciiva.com/11822/0900766b807f1e39-11822074.pdf?src-supplier=RSComponents, ComponentLink3Description=https://datasheet.ciiva.com/29387/506183-da-01-en-thermistor-murata-ncp15xh103j03rc-29387260.pdf?src-supplier=Conrad, ComponentLink3URL=https://datasheet.ciiva.com/29387/506183-da-01-en-thermistor-murata-ncp15xh103j03rc-29387260.pdf?src-supplier=Conrad, ComponentLink4Description=https://datasheet.ciiva.com/2848/r44e-2848211.pdf?src-supplier=Digi-Key, ComponentLink4URL=https://datasheet.ciiva.com/2848/r44e-2848211.pdf?src-supplier=Digi-Key, ComponentLink5Description=https://datasheet.ciiva.com/2848/r44e-2848212.pdf?src-supplier=Digi-Key, ComponentLink5URL=https://datasheet.ciiva.com/2848/r44e-2848212.pdf?src-supplier=Digi-Key, ComponentLink6Description=https://datasheet.ciiva.com/2848/r44e-2848213.pdf?src-supplier=Digi-Key, ComponentLink6URL=https://datasheet.ciiva.com/2848/r44e-2848213.pdf?src-supplier=Digi-Key, ComponentLink7Description=https://datasheet.ciiva.com/3282/l0770e-3282046.pdf?src-supplier=Avnet, ComponentLink7URL=https://datasheet.ciiva.com/3282/l0770e-3282046.pdf?src-supplier=Avnet, Depth=0.5mm, Height=0.5mm, Lead Free="Lead Free", Length=1mm, Manufacturer 1=Murata, Manufacturer Part Number=NCP15XH103J03RC, Manufacturer Part Number 1=NCP15XH103J03RC, Mount="Surface Mount", Number of Pins=2, Packaging="Tape and Reel", Power Rating=100mW, Pricing 1="1=0.12000, 5=0.11600, 10=0.10300, 25=0.09520, 50=0.07600, 100=0.06520, 500=0.05706, 1000=0.04891, 5000=0.04347 (USD)", Radiation Hardening=No, REACH SVHC="No SVHC", RoHS=Yes, Stock 1=295142, Supplier 1=Digi-Key, Termination=SMD/SMT, Width=0.5mm
SW1: "SWITCH TACTILE SPST-NO 0.05A 15V", Case/Package=SMD/SMT, Color=Yellow, Contact Resistance=200mR, Current Rating=50mA, Manufacturer=E-Switch, Max Operating Temperature=70°C, Max Voltage Rating (DC)=15V, Min Operating Temperature=-20°C, Operating Force=250gf, Package Quantity=5000, Supplier Part Number 1=EG4622CT-ND, Actuator Length=0mm, Category 1=Switches, Category 2="Tactile Switches", ComponentLink1Description=https://datasheet.ciiva.com/2902/p010338b-2902694.pdf?src-supplier=Digi-Key, ComponentLink1URL=https://datasheet.ciiva.com/2902/p010338b-2902694.pdf?src-supplier=Digi-Key, ComponentLink2Description=https://datasheet.ciiva.com/2902/tl3315-2902696.pdf?src-supplier=Digi-Key, ComponentLink2URL=https://datasheet.ciiva.com/2902/tl3315-2902696.pdf?src-supplier=Digi-Key, ComponentLink3Description=https://datasheet.ciiva.com/2902/tl3315-2902695.pdf?src-supplier=Digi-Key, ComponentLink3URL=https://datasheet.ciiva.com/2902/tl3315-2902695.pdf?src-supplier=Digi-Key, ComponentLink4Description=https://datasheet.ciiva.com/16156/tl3315-16156334.pdf?src-supplier=Onlinecomponents.com, ComponentLink4URL=https://datasheet.ciiva.com/16156/tl3315-16156334.pdf?src-supplier=Onlinecomponents.com, Contact Material=Silver, Contact Plating=Silver, Electrical Life=200000Cycles, Illumination Type=Non-Illuminated, Lead Free="Lead Free", Manufacturer 1=E-Switch, Manufacturer Part Number=TL3315NF250Q, Manufacturer Part Number 1=TL3315NF250Q, Mechanical Life=200000Cycles, Mount="Surface Mount", Orientation=Straight, Packaging="Tape and Reel", Pricing 1="1=0.21000, 10=0.20300, 25=0.19640, 50=0.18940, 100=0.17890, 250=0.16836, 500=0.16134, 1000=0.12276 (USD)", RoHS=Yes, Stock 1=53543, Supplier 1=Digi-Key, Switch Function=Off-Mom, Switch Travel=0.2mm, Termination="Gull Wing", Throw Configuration=SPST, Voltage Rating (DC)=15V
U1: "LOW IQ LINEAR BATTERY CHARGE MAN", Manufacturer="Texas Instruments", Supplier Part Number 1=296-BQ25150YFPRCT-ND, Category="PMIC - Battery Chargers", Manufacturer Part Number=BQ25150YFPR, Pricing 1="1=2.80000, 10=2.51300, 25=2.37600, 100=1.95360, 250=1.75296, 500=1.68960, 1000=1.40448 (USD)", Pricing 2="1=3.22000, 10=2.88900, 25=2.73160, 100=2.24590 (USD)", RoHS=No, Stock 1=1459, Stock 2=340, Supplier 1=Digi-Key, Supplier 2=Digi-Key, Supplier Part Number 2=296-53418-1-ND
U2: "IC NDP 32BIT 112KB SRAM WLBGA", Case/Package=WLBGA, Manufacturer=SYNTIANT, Category="Neural Decision Processor", Manufacturer Part Number=NDP100B0, Mount="Surface Mount"
U3: "LRA/ERM HAPTIC DRIVER WLCSP12", Manufacturer="Dialog Semiconductor", Supplier Part Number 1=1564-DA7280-00V42CT-ND, Manufacturer Part Number=DA7280-00V42, Pricing 1="1=2.36000, 10=2.12000, 25=2.00000, 100=1.70400, 250=1.60000, 500=1.40000, 1000=1.16000 (USD)", RoHS=No, RoHS Compliant=No, Stock 1=3330, Supplier 1=Digi-Key
U4: "IC FLSH 8MBIT SPI/QUAD I/O 8USON", Manufacturer=Macronix, Supplier Part Number 1=1092-1207-1-ND, Category=Memory, ComponentLink1Description=http://ckassoc.com/oldsite/pdf/Macronix_Product_Line_Card_July_2017_General%20_070617.pdf?src-supplier=Digi-Key, ComponentLink1URL=http://ckassoc.com/oldsite/pdf/Macronix_Product_Line_Card_July_2017_General%20_070617.pdf?src-supplier=Digi-Key, ComponentLink2Description=http://www.macronix.com/Lists/Datasheet/Attachments/7461/MX25R8035F,%20Wide%20Range,%208Mb,%20v1.6.pdf?src-supplier=Digi-Key, ComponentLink2URL=http://www.macronix.com/Lists/Datasheet/Attachments/7461/MX25R8035F,%20Wide%20Range,%208Mb,%20v1.6.pdf?src-supplier=Digi-Key, Lead Free="Lead Free", Manufacturer Part Number=MX25R8035FZUIL0, Mount="Surface Mount", Packaging="Tape and Reel", Pricing 1="1=0.62000, 10=0.56600, 25=0.55880, 50=0.55560, 100=0.49670, 250=0.49252, 500=0.48524, 1000=0.46788, 5000=0.42616 (USD)", RoHS=Yes, RoHS Compliant=Yes, Stock 1=42271, Supplier 1=Digi-Key

## Free pads (board coordinates)
  oct 1.168x1.168 hole 0.66 mask+0.04: 1(-8.1,4.8) 1(-8.1,6.3) 1(5.3,6.6) 1(5.3,8)

## Nets (pads, with @x,y where several pads share a name; then routed paths per layer and width w, separated by ;. In a path a pad name is that pad's centre, name@x,y a point inside that pad or via, vN(x,y) a via of type N, cw(c..) or ccw(c..) an arc to the next point about the centre after c; other vN are vias at no path point)
+3V3_EXT: C13.2 R10.2 U4.3 U4.7 U4.8
+PMID: C8.2 C12.2 U1.A2 U1.B2 U1.E4 U3.D1
+VBAT: C4.2 U1.A3 U1.B3
+VDD_0.9V: C1.2 C5.2 U1.D4 U2.A1
+VDD_1.8V: C2.2 C3.2 C9.2 C10.2 C11.2 C14.2 M1.9 OSC1.3 OSC2.3 R1.2 R2.2 R7.2 R8.2 R9.2 U1.D1 U1.E1 U2.A3 U3.B3
+VIN: C6.2 C7.2 U1.A1
ADCIN: U1.C4
GND: C1.1 C2.1 C3.1 C4.1 C5.1 C6.1 C7.1 C8.1 C9.1 C10.1 C11.1 C12.1 C13.1 C14.1 M1.2 M1.3 M1.4 M1.7 M1.8 M1.10 M1.11 M1.18 M1.32 M1.33 M1.41 M1.42 M1.43 M1.44 M1.46 M1.47 M1.48 M1.49 M1.50 M1.51 M1.52 OSC1.1 OSC1.4 OSC2.4 R4.1 SW1.3 SW1.4 U1.A4 U2.A2 U3.B1 U3.B2 U3.C1 U3.C3 U3.D3 U4.4
I2C_SCL: R8.1 U1.E3 U3.A2
I2C_SDA: R9.1 U1.E2 U3.A3
LRA_N: U3.C2
LRA_P: U3.D2
nCE: U1.C2
NDP_CLK: M1.17 R5.1 U2.B3
NDP_INT: U2.B1
NetM1_5: M1.5 M1.6
NetOSC1_2: OSC1.2 R5.2
NetOSC2_2: OSC2.2 R6.2
NetR3_1: R3.1 U2.D2
NetR4_2: R4.2 U1.B4
NetSW1_1: SW1.1 SW1.2 U1.C1
nLP: U1.D3
nLRA_INT: R7.1 U3.A1@-5,1.4
nPG: R1.1 U1.B1
nPMIC_INT: R2.1 U1.D2
P0.02: M1.20
P0.03: M1.19
P0.04: M1.24
P0.05: M1.23
P0.09/NFC1: M1.21
P0.10/NFC2: M1.22
P0.11: M1.34
P0.14: M1.13
P0.15: M1.14
P0.16: M1.15
P0.19: M1.35
P0.20: M1.45
P0.21/nRESET: M1.12
P0.22: M1.36
P0.23: M1.37
P0.24: M1.38
P0.25: M1.30
P0.26: M1.31
P0.27: M1.29
P0.28: M1.28
P0.29: M1.27
P0.30: M1.26
P.0.31: M1.25
PDM_CLK_R: R3.2 R6.1 U2.D3
PDM_DAT: U2.D1
SPI2_CS: R10.1 U4.1
SPI2_MISO: U4.2
SPI2_MOSI: U4.5
SPI2_SCLK: U4.6
SPI_MISO: U2.C2
SPI_MOSI: U2.C3
SPI_SCLK: U2.B2
SPI_SSB: U2.C1
SWDCLK: M1.39
SWDIO: M1.40
SWO: M1.16
pads on no net: J1.1 J1.2 J1.3 J1.4 J1.5 J1.6 J1.7 J1.8 J1.9 J1.10 J1.11 J1.12 J1.13 J1.14 J1.15 J1.16 J1.17 J1.18 J1.19 J1.20 J1.SH1 J1.SH2 J1.SH3 J1.SH4 M1.1 OSC2.1 U1.C3 U3.A1@-5,1.4 U4.9
copper on no net: | length 0.6
  L1 w0.4: -4.96,-9.346 -4.56,-9.346
  L1 w0.5: -5.12,-9.346 -4.96,-9.346

## Keep-outs
Keep-Out Layer:
  region: -8.97,-2.506 -4.97,-2.506 -4.97,-5.941 -4.145,-5.941 -4.145,-4.681 -3.594,-4.681 -3.594,-10.506 -8.97,-10.506
  text ".Layer_Name" at 15.369,-21.5 h1.52

## Other copper
L1:
  region: -4.97,-9.095 -4.97,-9.595 -8.47,-9.595 -8.47,-9.095
  region: -8.47,-4.256 -7.97,-4.256 -7.97,-9.506 -8.47,-9.506
  region: -8.47,-4.256 -6.97,-4.256 -6.97,-4.756 -8.47,-4.756
  text ".Layer_Name" at 15.369,-21.5 h1.52
L3:
  text ".Layer_Name" at 15.369,-21.5 h1.52
L4 (PWR):
  text ".Layer_Name" at 15.369,-21.5 h1.52
L2 (GND):
  text ".Layer_Name" at 15.369,-21.5 h1.52
L5 (GND):
  text ".Layer_Name" at 15.369,-21.5 h1.52
L6:
  text ".Layer_Name" at 15.369,-21.5 h1.52

## Silkscreen, mask and mechanical layers (free items; w line width, h text height)
Top Overlay:
  text ".Layer_Name" at 15.369,-21.5 h1.52
Bottom Overlay:
  text ".Layer_Name" at 15.369,-21.5 h1.52
Top Paste:
  text ".Layer_Name" at 15.369,-21.5 h1.52
Bottom Paste:
  text ".Layer_Name" at 15.369,-21.5 h1.52
Top Solder:
  text ".Layer_Name" at 15.369,-21.5 h1.52
Bottom Solder:
  text ".Layer_Name" at 15.369,-21.5 h1.52
Drill Guide:
  text ".Layer_Name" at 15.369,-21.5 h1.52
Board Outline:
  circle w0: c0,0 r14
  lines w0: -8.965,-10.5 -8.965,-3.864 ccw(c-10,0) -8.965,3.864 -8.965,7.085 -6.05,10 -5,10 5,10 6.447,8.553 6.447,5.796 ccw(c8,0) 6.447,-5.796 6.447,-10.153 6.1,-10.5 -8.965,-10.5
  text ".Layer_Name" at 15.369,-21.5 h1.52
Top Assembly:
  circle w0: c-9.225,2.3 r4.5
  circle w0: c8,0 r6
  circle w0: c-10,0 r4
  text "Actuator" at -12.5,-0.384 h1.52
  text "1254 Coin Battery" at 2.7,-0.414 h1.52
  text "COMPONENTS MARKED 'DNP' SHOULD NOT BE POPULATED." at -6.631,-13 h1.52
  text ".Layer_Name" at 15.369,-21.5 h1.52
Bottom Assembly:
  text "COMPONENTS MARKED 'DNP' SHOULD NOT BE POPULATED." at 124.369,-13 h1.52
  text ".Layer_Name" at 15.369,-21.5 h1.52
Top Courtyard:
  text ".Layer_Name" at 15.369,-21.5 h1.52
Bottom Courtyard:
  text ".Layer_Name" at 15.369,-21.5 h1.52
Top 3D Body:
  text ".Layer_Name" at 15.369,-21.5 h1.52
Bottom 3D Body:
  text ".Layer_Name" at 15.369,-21.5 h1.52
Manufacturing Notes:
  text "Files" at -6.881,114.294 h2.54
  text "BOARD INFORMATION" at 92.179,114.266 h2.54
  text "*.GTO - Top Overlay" at -6.881,111.726 h2.54
  text "Minimum Track: 100um" at 92.179,109.207 h2.54
  text "*.GTP - Top Paste" at -6.881,109.186 h2.54
  text "*.GTS - Top Solder" at -6.881,106.646 h2.54
  text "Minimum Gap: 100um" at 92.179,106.646 h2.54
  text "*.GTL - L1" at -6.881,104.106 h2.54
  text "Minimum Through Hole VIA: 0.20mm (drill). Drilling: L1-L6" at 92.179,104.106 h2.54
  text "*.G1  - L2 (GND)" at -6.881,101.566 h2.54
  text "Micro VIA: 0.10mm (laser). Drilling: L1-L2, L5-L6" at 92.179,101.566 h2.54
  text "*.G2  - L3" at -6.881,99.026 h2.54
  text "*.G3  - L4 (PWR)" at -6.881,96.486 h2.54
  text "1. REMOVE ALL NON-FUNCTIONAL INNER LAYER PADS." at 92.179,96.486 h2.54
  text "*.G4  - L5 (GND)" at -6.881,93.946 h2.54
  text "2. THIS BOARD CONTAINS IMPEDANCE CONTROLLED TRACKS, TRACK AND GAP SIZES ARE AS FOLLOWS:" at 92.177,93.946 h2.54
  text "*.GBL - L6" at -6.881,91.406 h2.54
  text "TYPE;" at 97.259,88.894 h2.54
  text "Impedance;" at 109.959,88.894 h2.54
  text "*.GBS - Bottom Solder" at -6.881,88.866 h2.54
  text "Layer (Reference);" at 130.279,88.866 h2.54
  text "Width (um);" at 165.839,88.866 h2.54
  text "Gap (um);" at 188.699,88.866 h2.54
  text "50 ohm;" at 109.959,86.347 h2.54
  text "100;" at 165.839,86.347 h2.54
  text "*.GBP - Bottom Paste" at -6.881,86.326 h2.54
  text "SE;" at 97.259,86.326 h2.54
  text "L1(L2), L6(L5);" at 130.279,86.326 h2.54
  text "50 ohm;" at 109.959,83.807 h2.54
  text "130;" at 165.839,83.807 h2.54
  text "*.GBO - Bottom Overlay" at -6.881,83.786 h2.54
  text "SE;" at 97.259,83.786 h2.54
  text "L3(L4)" at 130.279,83.786 h2.54
  text "*.GM1 - Board Outline" at -6.881,81.246 h2.54
  text "*.GM8 - Manufacturing Notes" at -6.881,78.706 h2.54
  text "3. FINISHED PANEL THICKNESS IS NOT CRITICAL: TO BE APPROXIMATELY 0.8mm" at 92.179,78.706 h2.54
  text "*.GM9 - Mechanical Drawings" at -6.881,76.166 h2.54
  text "*.GD1 - Drill Drawing (L1-L6)" at -6.881,73.626 h2.54
  text "4. SURFACE FINISH: Immersion Gold (ENIG)" at 92.179,73.626 h2.54
  text "*.GG1 - Drill Guide (L1-L6)" at -6.881,71.086 h2.54
  text "*.GD2 - [uVia] Drill Drawing (L1-L2)" at -6.881,68.596 h2.54
  text "5. SOLDER RESIST: APPLY TO BOTH SIDES COLOR - BLUE" at 92.179,68.546 h2.54
  text "*.GG2 - [uVia] Drill Guide (L1-L2)" at -6.881,66.096 h2.54
  text "*.GD3 - [uVia] Drill Drawing (L5-L6)" at -6.881,63.596 h2.54
  text "6. COMPONENT IDENT: COLOR TO BE WHITE" at 92.179,63.466 h2.54
  text "*.GG3 - [uVia] Drill Guide (L5-L6)" at -6.881,61.096 h2.54
  text "7. PANEL BY PCB MANUFACTURER" at 92.179,58.386 h2.54
  text "Layer Stack Table" at -6.631,56.636 h2.54
  text "Refer to 1.2T 6-layer 50 90 100 ohm(ATSRO).xls" at -6.631,54.096 h2.54
  text ".Layer_Name" at 15.369,-21.5 h1.52
Mechanical Drawings:
  text ".Layer_Name" at 15.369,-21.5 h1.52
Gerber Information:
  lines w0.2: -6.631,-23 104.369,-23 ; -6.631,-18.5 124.369,-18.5 ; 48.369,-27.5 48.369,-14 ; 104.369,-27.5 104.369,-14 ; -6.631,-27.5 -6.631,-14 124.369,-14 124.369,-27.5 -6.631,-27.5
  text "ALL ARTWORK VIEWED FROM TOP SIDE" at -4.631,-17 h1.52
  text "PRJ TITLE =" at 50.869,-17 h1.52
  text ".Project" at 69.369,-17 h1.52
  text "REV =" at 106.369,-17 h1.52
  text ".VersionRevision" at 115.869,-17 h1.52
  text "LAYER NAME =" at -4.631,-21.5 h1.52
  text "PRJ # =" at 50.869,-21.5 h1.52
  text ".ProjectNumber" at 63.369,-21.5 h1.52
  text "DRAWN BY" at 106.369,-21.5 h1.52
  text "JW" at 120.219,-21.5 h1.52
  text "keepin" at 109.919,-25.692 h3
  text "CONTACT =" at -4.631,-26 h1.52
  text "kim.jiwon@keepin.co.kr" at 10.869,-26 h1.52
  text "GENERATED =" at 50.869,-26 h1.52
  text ".Print_Date" at 69.869,-26 h1.52
  text ".Print_Time" at 87.369,-26 h1.52
Drill Drawing:
  circle w0.254: c-4.888,40.213 r0.701
  lines w0.381: -6.859,38.566 67.536,38.566 ; -6.859,41.72 67.536,41.72 ; 1.247,35.412 1.247,44.874 ; 7.409,35.412 7.409,44.874 ; 21.341,35.412 21.341,44.874 ; 27.626,35.412 27.626,44.874 ; 36.778,35.412 36.778,44.874 ; 49.295,35.412 49.295,44.874 ; 56.794,35.412 56.794,44.874 ; -6.859,35.412 67.536,35.412 67.536,44.874 -6.859,44.874 -6.859,35.412
  text "Drill Table" at -6.881,43.174 h2.54
  text "Symbol" at -4.967,42.666 h1.83
  text "Count" at 2.193,42.666 h1.83
  text "Hole Size" at 8.356,42.666 h1.83
  text "Plated" at 22.287,42.666 h1.83
  text "Hole Type" at 28.573,42.666 h1.83
  text "Drill Layer Pair" at 37.724,42.666 h1.83
  text "Via/Pad" at 50.242,42.666 h1.83
  text "Pad Shape" at 57.74,42.666 h1.83
  text "4" at 2.193,39.512 h1.52
  text "26.00mil (0.660mm)" at 8.356,39.512 h1.52
  text "PTH" at 22.287,39.512 h1.52
  text "Round" at 28.573,39.512 h1.52
  text "L1 - L6" at 37.724,39.512 h1.52
  text "Pad" at 50.242,39.512 h1.52
  text "Octagonal" at 57.74,39.512 h1.52
  text "4 Total" at 2.193,36.358 h1.52
  text ".Layer_Name" at 15.369,-21.5 h1.52